# EAGLE board Multiplier (EAGLE 9.6.2)
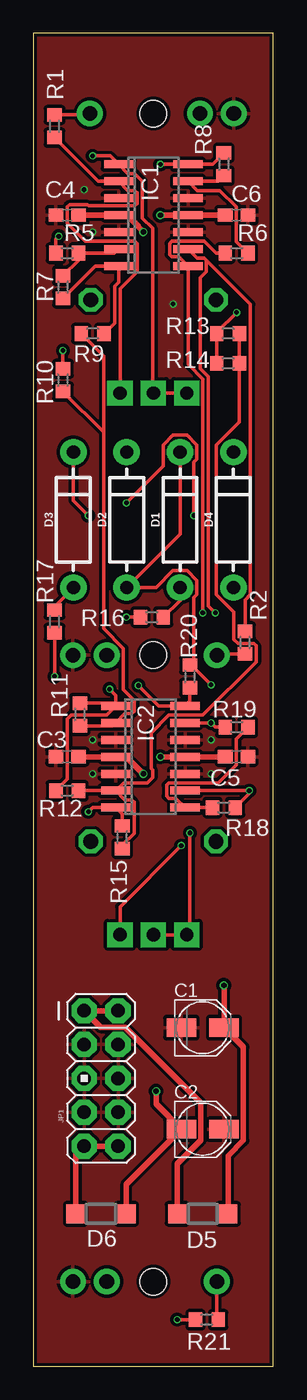
[diagram p0: board, top side]
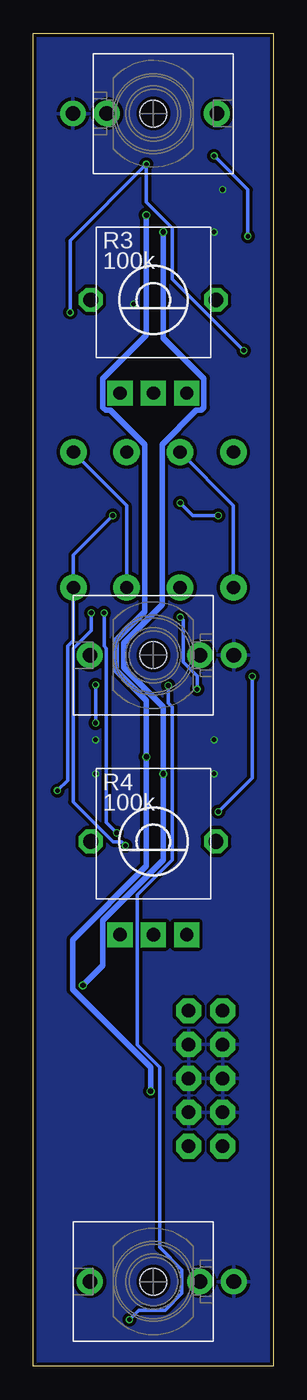
[diagram p1: board, bottom side, seen from below]

Size 18 x 100 mm. Coordinates in mm from the lower left corner, seen from the top.
Outline: 0,0 18,0 18,100 0,100 0,0
Copper layers (1*16): Top 0.035559375mm / dielectric 1.6mm / Bottom 0.035559375mm
Design rules "jlcpcb2layer": minimum track width 5mil, minimum drill 12mil, track to track 5mil, track to pad 5mil, pad to pad 5mil, via to via 5mil, smd to smd 5mil, copper to edge 8mil, drill to drill 6mil, minimum pad ring 5mil, minimum via ring 3mil, stop-mask expansion 2.5mil, vias tented up to drill 0mil, thermal gap 10mil

## Footprints (pad centres in the part's own frame; a part is rotated, then mirrored left to right if it is on the bottom)
RCL_PANASONIC_B = smd 2.2 x 1.4: + 1.6,0; - -1.6,0
RCL_C0603 = smd 1.1 x 1: 1 -0.85,0; 2 0.85,0
DIODE-1N4001 = drill 1 pad 1.981: A -5.08,0; C 5.08,0
DIODE_SOD123 = smd 1.4 x 1.4: A 1.9,0; C -1.9,0
SO14 = smd 0.6 x 2.2: 1 -3.81,-2.6; 2 -2.54,-2.6; 3 -1.27,-2.6; 4 0,-2.6; 5 1.27,-2.6; 6 2.54,-2.6; 7 3.81,-2.6; 8 3.81,2.6; 9 2.54,2.6; 10 1.27,2.6; 11 0,2.6; 12 -1.27,2.6; 13 -2.54,2.6; 14 -3.81,2.6
OG-PJ301_WQP_PJ_301M8 = drill 1.1 pad 1.93: P1 0,-6.032; P2 0,-3.493; P3 0,4.763 | hole 2: 0,0
OG-HEADER_AVR_ICSP = drill 1.016 pad 1.88 octagon: 1 -1.27,5.08; 2 1.27,5.08; 3 -1.27,2.54; 4 1.27,2.54; 5 -1.27,0; 6 1.27,0; 7 -1.27,-2.54; 8 1.27,-2.54; 9 -1.27,-5.08; 10 1.27,-5.08
RESISTOR_R0603 = smd 1 x 1.1: 1 -0.85,0; 2 0.85,0
POT-ALPS_ALPS_POT_VERTICAL_PS2 = drill 1 pad 1.88 square: P$1 -2.5,7; P$2 0,7; P$3 2.5,7 | drill 1.1 pad 1.778 octagon: P$4 -4.7,0; P$5 4.7,0

## Placement (x,y rotation side)
C1  [RCL_PANASONIC_B]  12.7,25.4 0 top
C2  [RCL_PANASONIC_B]  12.7,17.78 0 top
C3  [RCL_C0603]  2.54,45.72 180 top
C4  [RCL_C0603]  2.54,86.36 180 top
C5  [RCL_C0603]  15.24,45.72 180 top
C6  [RCL_C0603]  15.24,86.36 180 top
D1  [DIODE-1N4001]  11,63.5 90 top
D2  [DIODE-1N4001]  7,63.5 90 top
D3  [DIODE-1N4001]  3,63.5 90 top
D4  [DIODE-1N4001]  15,63.5 90 top
D5  [DIODE_SOD123]  12.7,11.43 180 top
D6  [DIODE_SOD123]  5.08,11.43 0 top
IC1  TL074D  [SO14]  9,86.36 270 top
IC2  TL074D  [SO14]  8.78,45.72 270 top
J1  OG-PJ301_PJ301_THONKICONN8  [OG-PJ301_WQP_PJ_301M8]  9,93.98 270 bottom
J2  OG-PJ301_PJ301_THONKICONN8  [OG-PJ301_WQP_PJ_301M8]  9,53.34 90 bottom
J3  OG-PJ301_PJ301_THONKICONN8  [OG-PJ301_WQP_PJ_301M8]  9,6.35 90 bottom
JP1  M05X2PTH  [OG-HEADER_AVR_ICSP]  5.08,21.59 0 top
R1  50k  [RESISTOR_R0603]  1.59,93.03 270 top
R2  50k  [RESISTOR_R0603]  15.88,54.29 90 top
R3  100k  [POT-ALPS_ALPS_POT_VERTICAL_PS2]  9,80.01 180 bottom
R4  100k  [POT-ALPS_ALPS_POT_VERTICAL_PS2]  9,39.37 180 bottom
R5  100k  [RESISTOR_R0603]  2.54,83.5 0 top
R6  100k  [RESISTOR_R0603]  15.24,83.5 0 top
R7  100k  [RESISTOR_R0603]  2.22,80.96 270 top
R8  100k  [RESISTOR_R0603]  14.29,90.17 90 top
R9  100k  [RESISTOR_R0603]  4.45,77.47 180 top
R10  100k  [RESISTOR_R0603]  2.22,73.98 270 top
R11  100k  [RESISTOR_R0603]  3.49,48.9 90 top
R12  100k  [RESISTOR_R0603]  2.54,43.18 0 top
R13  100k  [RESISTOR_R0603]  14.61,77.47 0 top
R14  100k  [RESISTOR_R0603]  14.61,75.25 0 top
R15  100k  [RESISTOR_R0603]  6.67,39.69 90 top
R16  100k  [RESISTOR_R0603]  8.89,56.2 0 top
R17  100k  [RESISTOR_R0603]  1.59,55.88 270 top
R18  100k  [RESISTOR_R0603]  14.29,41.91 180 top
R19  100k  [RESISTOR_R0603]  15.24,47.94 180 top
R20  100k  [RESISTOR_R0603]  11.75,51.75 270 top
R21  1k  [RESISTOR_R0603]  13.02,3.49 0 top

## Library data of the parts
C1-C6 D5 D6 IC1 IC2 J1-J3 JP1 R1-R21 = my-library
D1-D4 = my-library; PROD_ID: DIO-09176

## Nets
GND: C1.- C2.+ C3.2 C4.2 C5.1 C6.1 IC1.3 IC1.5 IC1.10 IC1.12 IC2.3 IC2.5 IC2.10 IC2.12 J1.P1 J2.P1 J3.P1 JP1.3 JP1.4 JP1.5 JP1.6 JP1.7 JP1.8
INPUT_A: IC1.7 R7.2 R9.1
INPUT_B: IC1.14 R8.2 R10.1 R13.1 R14.1
N$1: J1.P3 R1.1
N$2: J2.P3 R2.1
N$3: IC1.9 R2.2 R4.P$1
N$4: IC1.2 R1.2 R3.P$1
N$5: IC1.1 R3.P$2 R3.P$3 R5.1
N$6: IC1.8 R4.P$2 R4.P$3 R6.1
N$7: IC2.2 R9.2 R10.2 R11.1
N$8: IC1.6 R5.2 R7.1
N$9: IC1.13 R6.2 R8.1
N$10: D1.A D4.C R16.2
N$11: IC2.6 R12.2 R13.2 R14.2 R15.1
N$12: D1.C D2.A IC2.13 R19.2 R20.1
N$13: D2.C D3.A R17.1
N$14: D3.C D4.A IC2.9 R18.1
N$15: IC2.8 R18.2 R19.1
N$16: IC2.14 R20.2 R21.1
N$17: J3.P3 R21.2
N$18: D5.A JP1.1 JP1.2
N$22: D6.C JP1.9 JP1.10
TO_RING_A: IC2.1 R11.2 R12.1 R16.1
TO_RING_B: IC2.7 R15.2 R17.2
VCC: C1.+ C3.1 C4.1 D5.C IC1.4 IC2.4
VEE: C2.- C5.2 C6.2 D6.A IC1.11 IC2.11

## Tracks (layer width: path | path; a pad name or v marks a point on that pad's centre or on a via)
GND  (via drill 0.35)
  other vias: 4.45,46.99 10.48,79.69 13.34,46.99 13.34,44.45 4.45,44.45 3.81,88.27 4.45,85.09
  pour Top (isolate 0.254): 0,100.01 18.1,100.01 18.1,0 0,0
  pour Bottom (isolate 0.254): 0,100.01 18.1,100.01 18.1,0 0,0
INPUT_A
  Top 0.254: R7.2 4.66,82.55 IC1.7 6.4,81.33 6.09,81.02 6.09,78.27 R9.1
INPUT_B  (via drill 0.35)
  Top 0.254: R8.2 13.44,90.17 IC1.14 v9.53,90.17 | v2.22,76.2 R10.1 | v15.24,79.06 13.76,77.57 R13.1 R14.1
  Bottom 0.254: v2.22,76.2 7.57,81.55 7.57,85.37 9.53,87.33 v9.53,90.17 15.24,84.45 v15.24,79.06
N$1
  Top 0.254: J1.P3 4.13,93.88 R1.1
N$2
  Top 0.254: J2.P3 13.87,53.44 R2.1
N$3  (via drill 0.35)
  Top 0.254: R2.2 15.88,57.5 16.27,57.89 16.27,79.67 12.98,82.97 | 12.98,82.97 12.82,83.13 12.29,83.13 IC1.9 | 12.98,82.97 12.98,82.13 12.53,81.69 12.53,74.83 13.13,74.23 13.13,57.04 v13.65,56.52 | v11.09,39.05 6.5,34.46 R4.P$1
  Bottom 0.254: v13.65,56.52 13.65,55.21 15.01,53.86 15.01,42.34 12.02,39.35 11.38,39.35 v11.09,39.05
N$4
  Top 0.254: R1.2 4.87,88.9 IC1.2 7.09,88.21 7.62,88.21 7.78,88.05 7.78,87.21 7.62,87.05 4.14,87.05 4.06,87.14 2.72,87.14 2.56,86.98 2.56,85.74 3.9,84.4 7.62,84.4 7.78,84.24 7.78,82.13 6.5,80.86 R3.P$1
N$5  (via drill 0.35)
  Top 0.254: R5.1 1.69,84.56 v1.91,84.77 | v4.45,90.81 5.76,90.81 IC1.1 7.09,89.48 7.62,89.48 8.19,88.91 8.19,86.12 8.94,85.37 8.94,73.07 R3.P$2 R3.P$3
  Bottom 0.254: v1.91,84.77 1.91,88.27 v4.45,90.81
N$6  (via drill 0.35)
  Top 0.254: v12.7,56.52 12.7,71.94 12.72,71.95 12.72,74.07 11.6,75.19 IC1.8 10.91,83.24 10.38,83.24 10.22,83.4 10.22,84.24 10.38,84.4 12.82,84.4 13.71,83.5 R6.1 | v11.75,40.01 11.75,32.62 R4.P$3 R4.P$2
  Bottom 0.254: v12.7,56.52 12.7,54.04 12.52,53.86 12.52,40.77 v11.75,40.01
N$7
  Top 0.254: R9.2 5.28,75.78 5.28,70.07 | 5.28,70.07 5.28,55.33 6.75,53.86 6.75,50.75 7.56,49.95 7.56,49.11 7.4,48.95 6.87,48.95 IC2.2 5.96,48.05 R11.1 | R10.2 5.28,70.07
N$8
  Top 0.254: IC1.6 6.08,83.5 R5.2 3.39,82.98 R7.1
N$9
  Top 0.254: R6.2 15.22,84.37 15.22,86.98 13.99,88.21 12.29,88.21 IC1.13 13.87,88.9 R8.1
N$10
  Top 0.254: R16.2 11,57.46 D1.A
  Bottom 0.254: D4.C 11,64.58 D1.A
N$11
  Top 0.254: R12.2 IC2.6 | R13.2 R14.2 15.46,70.83 13.73,69.11 13.73,57.89 15.05,56.58 15.05,54.53 15.35,54.22 16.54,54.22 16.7,54.06 16.7,52.83 12.72,48.84 10.16,48.84 8.84,47.52 8.84,44.83 8.94,44.73 8.94,44.17 8.54,43.77 6.77,43.77 IC2.6 | R15.1 6.67,39.09 7.56,39.98 7.56,42.33 7.4,42.49 6.87,42.49 IC2.6
N$12  (via drill 0.35)
  Top 0.254: D1.C 11,62.42 D2.A 9.2,58.42 10.47,59.69 11.53,59.69 12.27,58.95 12.27,57.89 12.04,57.67 12.04,52.41 v13.34,51.12 11.85,52.6 R20.1 | IC2.13 v13.34,48.26 13.65,47.94 R19.2
  Bottom 0.254: v13.34,51.12 v13.34,48.26
N$13
  Top 0.254: R17.1 1.59,57.01 D3.A
  Bottom 0.254: D2.C 3,64.58 D3.A
N$14  (via drill 0.35)
  Top 0.254: D3.C 3,64.94 v4.13,63.82 | v12.04,63.82 12.04,67.83 12.27,68.05 12.27,69.11 11.53,69.85 10.47,69.85 9.73,69.11 9.73,67.52 v6.99,64.77 | IC2.9 v16.19,43.18 16.19,42.97 R18.1
  Bottom 0.254: v4.13,63.82 6.03,63.82 v6.99,64.77 | v12.04,63.82 15,60.86 D4.A 15,54.44 15.41,54.02 15.41,43.96 v16.19,43.18
N$15
  Top 0.254: R18.2 IC2.8 10.69,42.6 10.16,42.6 10,42.76 10,43.6 10.16,43.76 13.88,43.76 15.22,45.1 15.22,47.07 R19.1
N$16  (via drill 0.35)
  Top 0.254: R20.2 11.75,49.9 IC2.14 9.42,49.53 v7.89,51.07 | v10.79,3.49 R21.1
  Bottom 0.254: v7.89,51.07 7.89,49.77 7.57,49.46 7.57,38 10.22,35.35 10.22,24.12 8.53,22.42 8.53,8.91 6.86,7.24 6.86,5.46 8.11,4.21 10.08,4.21 v10.79,3.49
N$17
  Top 0.254: R21.2 13.76,3.6 J3.P3
N$18
  Top 0.406: JP1.2 JP1.1 5.05,25.43 6.89,25.43 12.56,19.76 12.56,16.93 10.8,15.18 D5.A
N$22
  Top 0.406: JP1.10 JP1.9 3.18,15.88 D6.C
TO_RING_A  (via drill 0.35)
  Top 0.254: IC2.1 5.96,49.74 R11.2 | IC2.1 5.49,48.84 2.84,48.84 2.56,48.56 2.56,44.05 R12.1 | IC2.1 6.18,50.34 v5.71,50.8 | v6.99,56.2 R16.1
  Bottom 0.254: v5.71,50.8 5.71,51.79 6.75,52.82 6.75,55.97 v6.99,56.2
TO_RING_B  (via drill 0.35)
  Top 0.254: R15.2 6.67,41.42 IC2.7 4.45,41.91 v4.13,41.59 | v1.59,51.75 R17.2
  Bottom 0.254: v4.13,41.59 1.59,44.13 v1.59,51.75
VCC  (via drill 0.4)
  Top 0.406: D5.C 14.6,15.78 15.76,16.93 15.76,23.94 C1.+ v14.3,28.56 v14.29,28.57 | v8.26,44.45 6.99,45.72 IC2.4 C3.1 | v8.26,85.09 7.86,85.49 7.86,85.54 7.03,86.36 IC1.4 C4.1
  Bottom 0.406: v14.29,28.57 12.79,30.07 12.79,33.46 8.26,38 v8.26,44.45 8.26,49.46 11.22,52.42 11.22,54.26 8.35,57.13 8.35,69.14 5.77,71.72 5.41,71.72 5.21,71.92 5.21,74.1 8.26,77.15 v8.26,85.09
VEE  (via drill 0.4)
  Top 0.406: D6.A 6.98,13.66 C2.- 9.21,19.67 v9.21,20.64 | v9.53,45.72 IC2.11 C5.2 | v9.53,86.36 IC1.11 C6.2
  Bottom 0.406: v9.21,20.64 9.21,22.42 15.05,28.26 15.05,32 9.53,37.52 v9.53,45.72 9.53,49.94 11.78,52.19 11.78,54.49 9.65,56.62 9.65,69.14 12.23,71.72 12.59,71.72 12.79,71.92 12.79,74.1 9.53,77.37 v9.53,86.36

## Text on the board
tDocu: SoundFlask | Hey Charley | 2020 | Ver. 1.0 | Multiplier